# Altium PCB wireTest.PcbDoc (part 1 of 2)
Units mm, origin at the board's own origin, x right, y up, seen from the top; angles counter-clockwise.
Board outline 69.72 x 89.74 mm, 2 copper layers (Top Layer, Bottom Layer); 104 components, 99 nets, 356 pads, 85 vias.
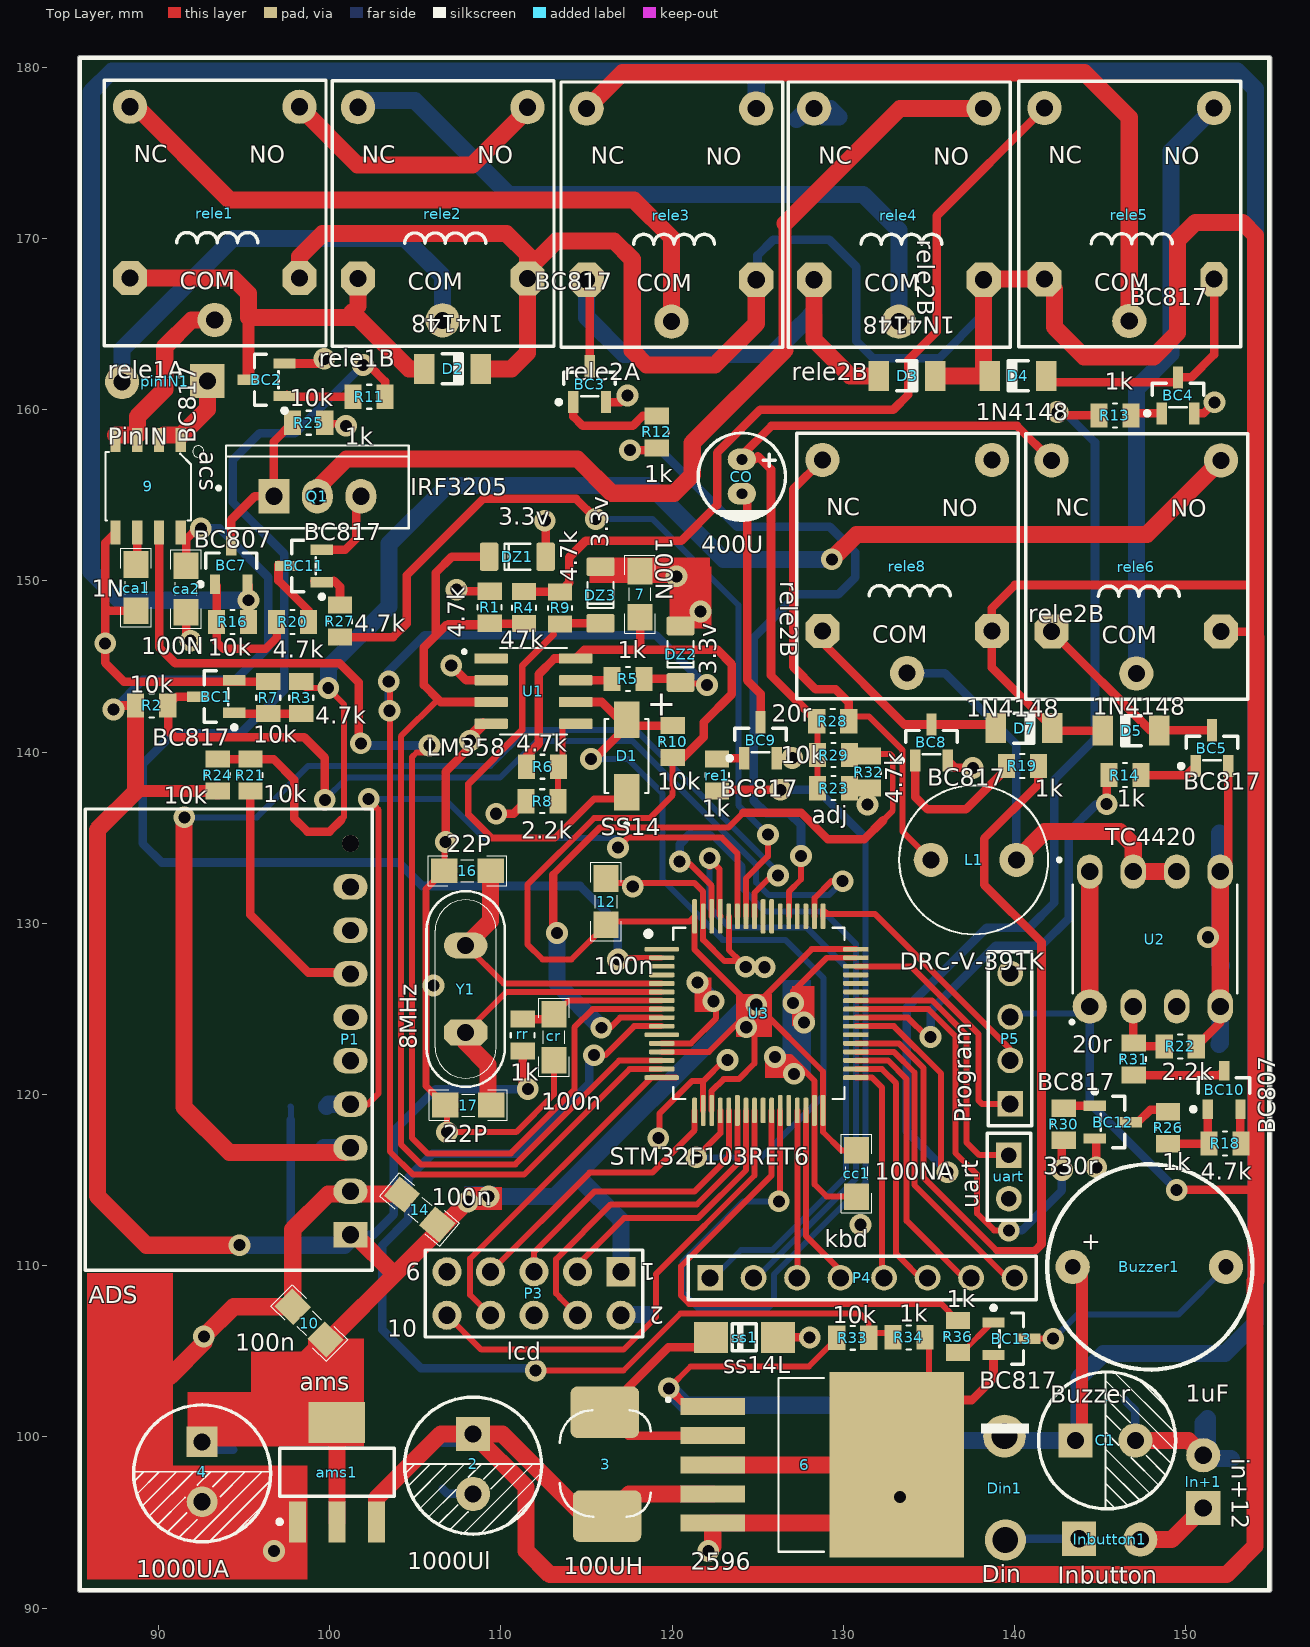
[diagram p0: Top Layer view]
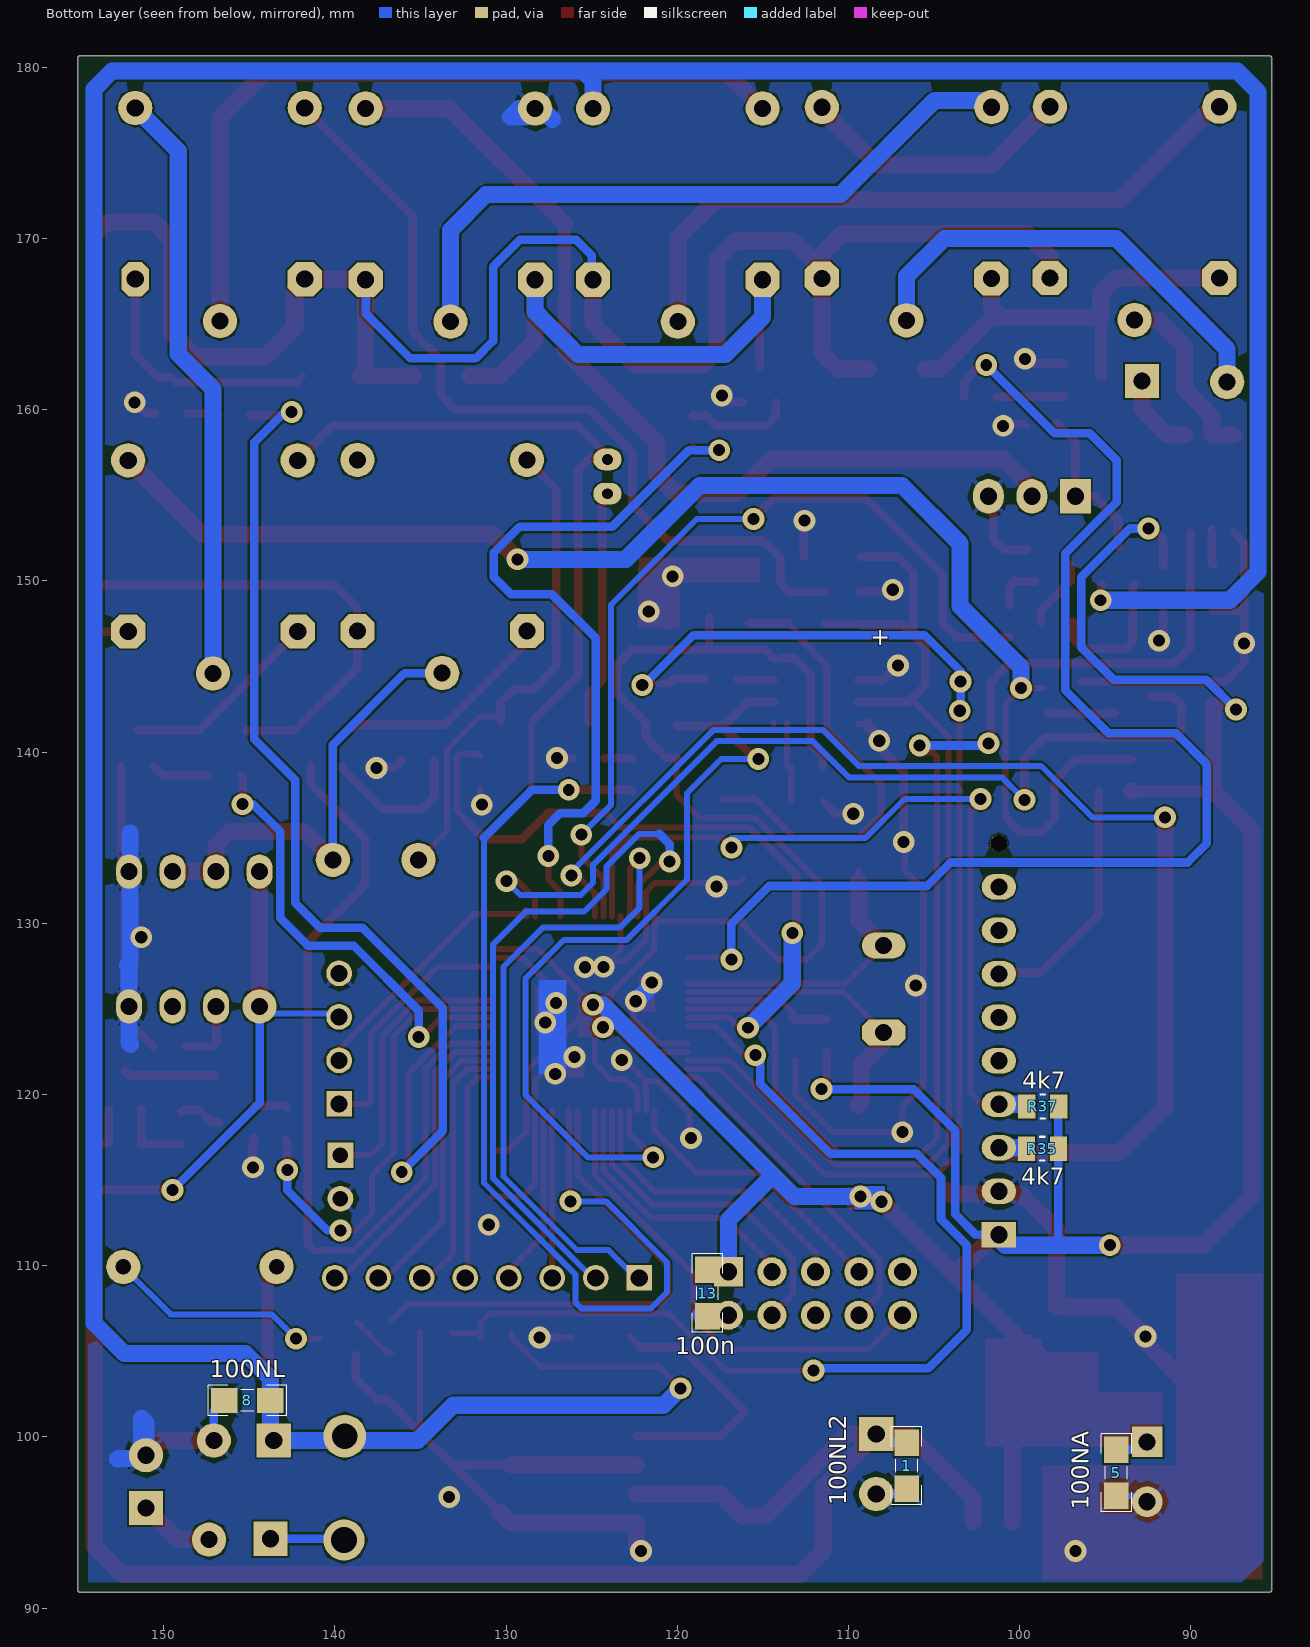
[diagram p1: Bottom Layer view, seen from below]
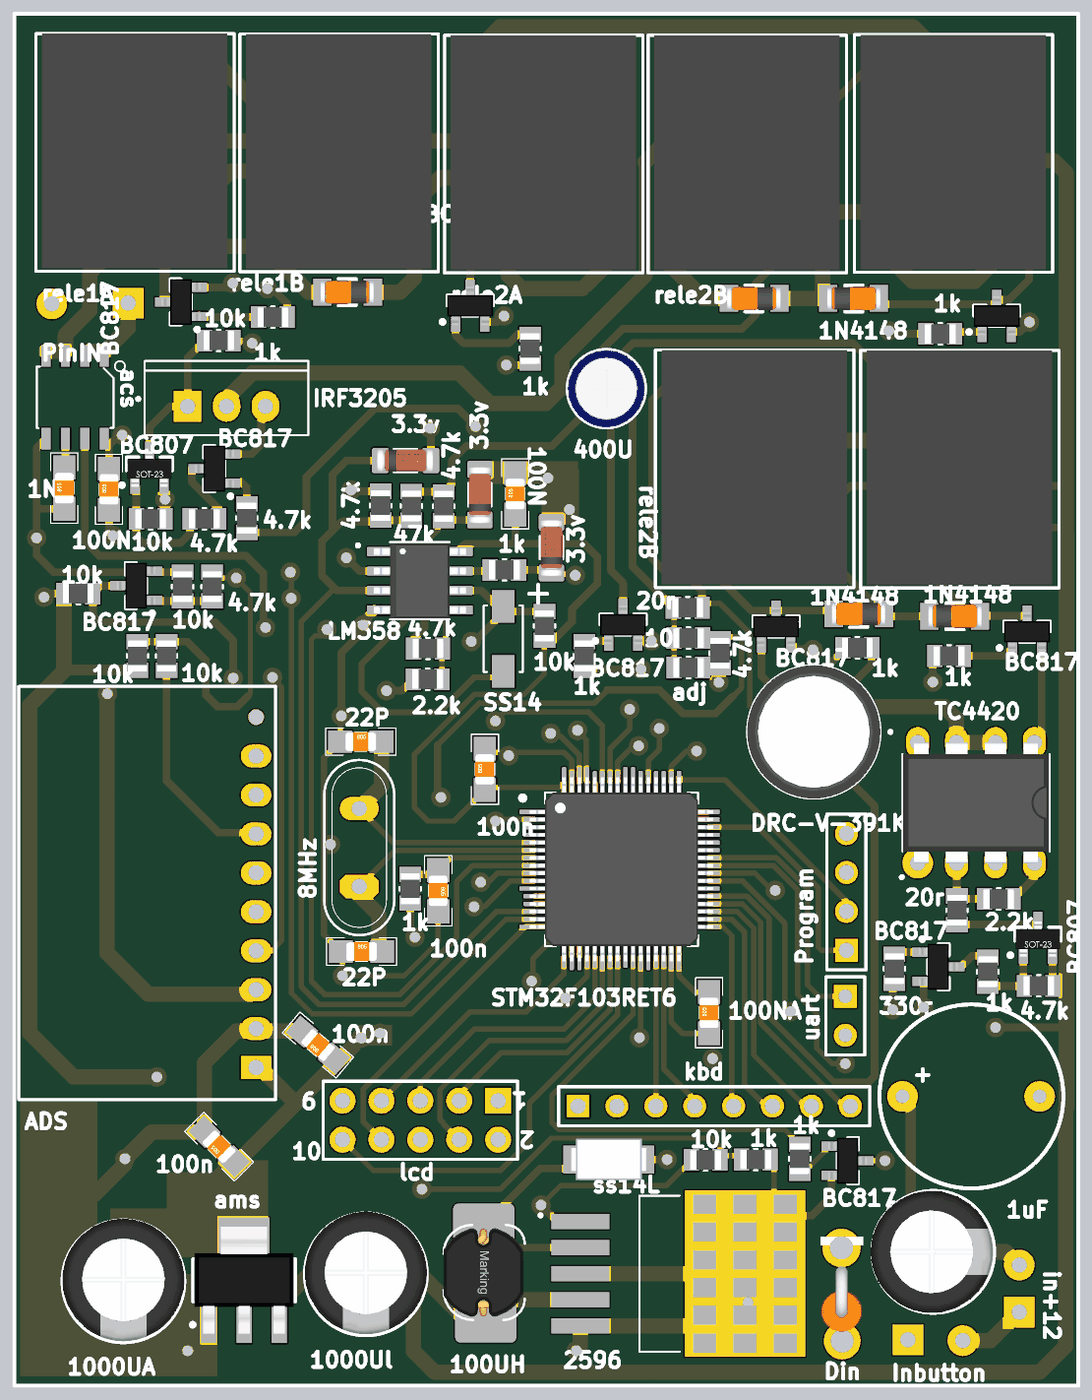
[diagram p2: 3D render of the assembled board from above, using the file's embedded part models]
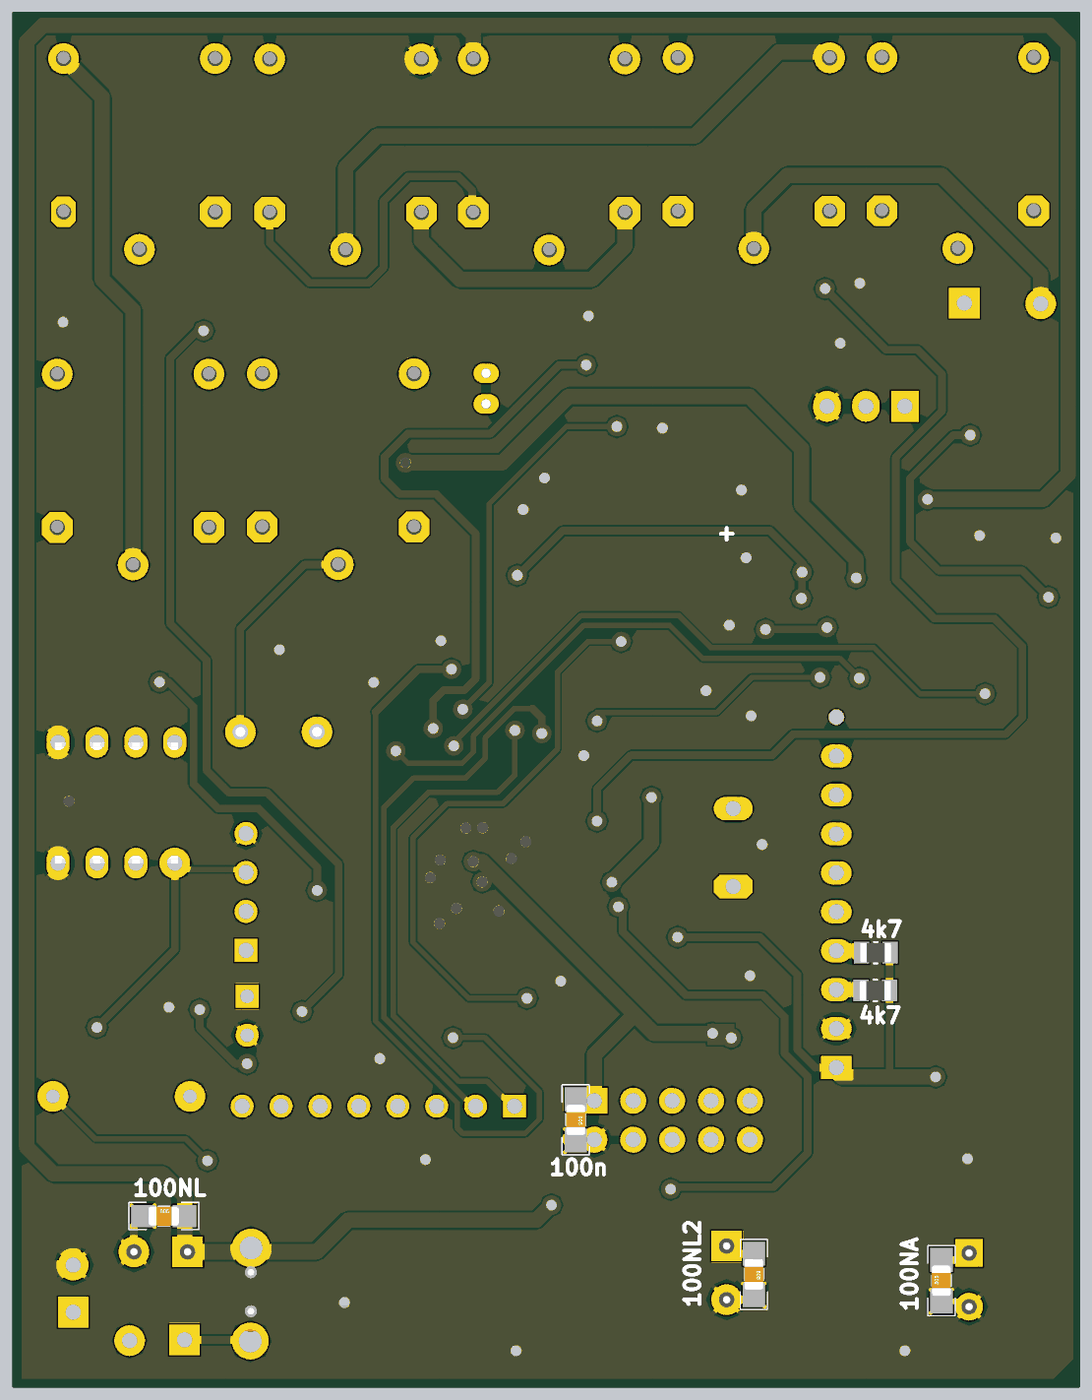
[diagram p3: 3D render of the assembled board from below, using the file's embedded part models]

## Layer stack, top to bottom
Top Solder: solder mask 0.0102, Solder Resist, Dk 3.5
Top Layer: signal copper 0.0356
Dielectric 1: dielectric 0.32, FR-4, Dk 4.8
Bottom Layer: signal copper 0.0356
Bottom Solder: solder mask 0.0102, Solder Resist, Dk 3.5

## Board outline
85.42,90.932 cw(c85.42,91.059) 85.293,91.059 85.293,180.543 cw(c85.42,180.543) 85.42,180.671 154.889,180.671 cw(c154.889,180.543) 155.017,180.543 155.017,91.059 cw(c154.889,91.059) 154.889,90.932

## Design rules (kind name [scope] priority, off if disabled: settings)
Clearance [All] p1: gap=0.1 ignorepadtopadclearanceinfootprint=FALSE
PolygonConnect [All] p1: thpad.connectstyle=Relief thpad.reliefconductorwidth=0.254 thpad.reliefentries=4 thpad.polygonreliefangle="45 Angle" thpad.airgapwidth=0.254 smdpad.connectstyle=Relief smdpad.reliefconductorwidth=0.254 smdpad.reliefentries=4 smdpad.polygonreliefangle="45 Angle" smdpad.airgapwidth=0.254 via.connectstyle=Direct via.reliefconductorwidth=0.254 via.reliefentries=4 via.polygonreliefangle="90 Angle" via.airgapwidth=0.254
RoutingVias [All] p1: holewidth=0.7 width=1.27 viastyle="Through Hole" minholewidth=0.7 minwidth=1.27 maxholewidth=0.7 maxwidth=1.27 viatemplateguid#1={EFB9FA06-F7A7-452A-BE94-403044DDEC13} viatemplatename#1=v127h71
SolderMaskExpansion [All] p1: expansion=0.102
Width [All] p1: maxlimit=1 minlimit=0.35 preferedwidth=0.5
30 further rules are at their usual default settings.

## Components (designator, comment, footprint, x,y, rotation, side; value= is the part's Value field where it differs from the comment)
1 "100NL2" CAPC3413X12N 106.604,98.323 r270 bottom
2 "1000Ul" "Cap electrolitic radial 8x12-3.5"#1 108.382,98.425 r270 top value=1uF
3 "100UH" "Inductor SMD 3x3.2mm" 116.053,98.45 r270 top value=4µ7
4 "1000UA" "Cap electrolitic radial 8x12-3.5"#2 92.558,97.968 r270 top value=1uF
5 "100NA" CAPC3413X12N 94.361,97.917 r90 bottom
6 "2596" TO170P1524X483-6N 128.778,98.374 r0 top
7 "100N" CAPC3413X12N 118.135,149.225 r90 top
8 "100NL" CAPC3413X12N 145.11,102.133 r180 bottom
9 "acs" SOIC8-1.27-5X4MM 89.408,155.524 r180 top
10 "100n" CAPC3413X12N 98.806,106.655 r135 top
12 "100n" CAPC3413X12N 116.154,131.267 r90 top
13 "100n" CAPC3413X12N 118.237,108.407 r270 bottom
14 "100n" CAPC3413X12N 105.258,113.284 r140 top
16 "22P" CAPC3413X12N 108.052,133.071 r0 top
17 "22P" CAPC3413X12N 108.102,119.38 r0 top
ams1 "ams" MP04A_N 100.432,97.942 r90 top
BC1 "BC817" SOT23_N 93.387,143.241 r180 top
BC2 "BC817" SOT23_N 96.317,161.747 r180 top
BC3 "BC817" SOT23_N 115.189,161.493 r90 top
BC4 "BC817" SOT23_N 149.555,160.833 r90 top
BC5 "BC817" SOT23_N 151.536,140.233 r90 top
BC7 "BC807" SOT23_BEC_N 94.259,150.927 r90 top
BC8 "BC817" SOT23_N 135.153,140.564 r90 top
BC9 "BC817" SOT23_N 125.171,140.691 r90 top
BC10 "BC807" SOT23_BEC_N 152.248,120.269 r90 top
BC11 "BC817" SOT23_N 98.501,150.876 r180 top
BC12 "BC817" SOT23_N 145.745,118.389 r0 top
BC13 "BC817" SOT23_N 139.827,105.74 r0 top
Buzzer1 "Buzzer" BUZZER 147.904,109.931 r0 top
C1 "1uF" "Cap electrolitic radial 8x12-3.5"#1 145.316,99.797 r0 top
ca1 "1N" CAPC3413X12N 88.697,149.606 r90 top
ca2 "100N" CAPC3413X12N 91.618,149.53 r90 top
cc1 "100NA" CAPC3413X12N 130.785,115.392 r90 top
CO "400U" "cap 01" 124.079,156.092 r90 top value=1uF
cr "100n" CAPC3413X12N 113.106,123.342 r270 top
D1 "SS14" DIOM4325X250N 117.348,139.776 r90 top
D2 "1N4148" "Diode 1n4148 SMD" 105.539,162.382 r0 top
D3 "1N4148" "Diode 1n4148 SMD" 132.08,161.976 r0 top
D4 "1N4148" "Diode 1n4148 SMD" 141.857,161.976 r180 top
D5 "1N4148" "Diode 1n4148 SMD" 148.461,141.249 r180 top
D7 "1N4148" "Diode 1n4148 SMD" 138.915,141.402 r0 top
Din1 "Din" "Diode 1W Stand" 139.446,97.206 r90 top
DZ1 "3.3v" "SOD80, LL-34" 110.973,151.409 r0 top value=12V
DZ2 "3.3v" "SOD80, LL-34" 120.498,145.72 r90 top value=12V
DZ3 "3.3v" "SOD80, LL-34" 115.824,149.174 r90 top value=12V
In+1 "in+12" HDR1X2#1 151.028,96.088 r90 top
Inbutton1 "Inbutton" HDR1X2#2 144.145,94.056 r0 top
L1 "DRC-V-391K" IND_DRC-V-391K 137.617,133.706 r180 top
P1 "ADS" HDR1X10 101.219,111.811 r90 top
P3 "lcd" HDR2X5 117.018,109.652 r180 top
P4 "kbd" HDR1X8 122.225,109.296 r0 top
P5 "Program" HDR1X4 139.751,119.456 r90 top
pinIN1 "PinIN" HDR1X2#3 91.745,161.62 r180 top
Q1 "IRF3205" TO254P1067X483X3124-3P 96.749,154.94 r0 top
R1 "4.7k" RESC2012X65N 109.347,148.463 r270 top
R2 "10k" RESC2012X65N 89.611,142.723 r180 top
R3 "4.7k" RESC2012X65N 98.349,143.18 r90 top
R4 "47k" RESC2012X65N 111.354,148.438 r90 top
R5 "1k" RESC2012X65N 117.424,144.272 r180 top
R6 "4.7k" RESC2012X65N 112.44,139.141 r180 top
R7 "10k" RESC2012X65N 96.418,143.18 r90 top
R8 "2.2k" RESC2012X65N 112.414,137.135 r180 top
R9 "4.7k" RESC2012X65N 113.462,148.418 r90 top
R10 "10k" RESC2012X65N 120.04,140.614 r270 top
R11 "1k" RESC2012X65N 102.311,160.757 r0 top
R12 "1k" RESC2012X65N 119.101,158.699 r270 top
R13 "1k" RESC2012X65N 145.872,159.664 r180 top
R14 "1k" RESC2012X65N 146.452,138.659 r180 top
R16 "10k" RESC2012X65N 94.336,147.599 r0 top
R18 "4.7k" RESC2012X65N 152.298,117.145 r180 top
R19 "1k" RESC2012X65N 140.462,139.192 r180 top
R20 "4.7k" RESC2012X65N 97.841,147.599 r180 top
R21 "10k" RESC2012X65N 95.377,138.654 r270 top
R22 "2.2k" RESC2012X65N 149.682,122.809 r180 top
R23 "adj" RESC2012X65N 129.438,137.897 r0 top
R24 "10k" RESC2012X65N 93.472,138.659 r270 top
R25 "10k" RESC2012X65N 98.781,159.233 r180 top
R26 "1k" RESC2012X65N 148.971,118.059 r90 top
R27 "4.7k" RESC2012X65N 100.609,147.65 r90 top
R28 "20r" RESC2012X65N 129.388,141.808 r180 top
R29 "10k" RESC2012X65N 129.438,139.827 r180 top
R30 "330r" RESC2012X65N 142.875,118.262 r270 top
R31 "20r" RESC2012X65N 146.964,122.072 r90 top
R32 "4.7k" RESC2012X65N 131.496,138.836 r270 top
R33 "10k" RESC2012X65N 130.556,105.791 r180 top
R34 "1k" RESC2012X65N 133.833,105.816 r180 top
R35 "4k7" RESC2012X65N 98.679,116.84 r0 bottom
R36 "1k" RESC2012X65N 136.703,105.867 r270 top
R37 "4k7" RESC2012X65N 98.654,119.304 r0 bottom
re1 "1k" RESC2012X65N 122.631,138.659 r270 top
rele1 "rele1A" "Relay 15.40x12.10x13.10"#1 93.291,165.241 r0 top
rele2 "rele1B" "Relay 15.40x12.10x13.10"#1 106.607,165.215 r0 top
rele3 "rele2A" "Relay 15.40x12.10x13.10"#1 119.967,165.139 r0 top
rele4 "rele2B" "Relay 15.40x12.10x13.10"#1 133.251,165.139 r0 top
rele5 "rele2B" "Relay 15.40x12.10x13.10"#2 146.707,165.172 r0 top
rele6 "rele2B" "Relay 15.40x12.10x13.10"#1 147.12,144.591 r0 top
rele8 "rele2B" "Relay 15.40x12.10x13.10"#1 133.734,144.616 r0 top
rr "1k" RESC2012X65N 111.277,123.469 r90 top
ss1 "ss14L" "Diode 1N4007 SMD" 126.196,105.816 r180 top
U1 "LM358" SOIC127P599X175-8N 111.906,143.561 r0 top
U2 "TC4420" DIP787W46P254L927H533Q8 148.209,129.083 r90 top
U3 "STM32F103RET6" QFP50P1200X1200X160-64N 125.07,124.739 r0 top
uart "uart" HDR1X2#4 139.675,116.459 r270 top
Y1 "8MHz" My_Crystal 107.95,126.162 r90 top

## Footprints (in the part's own frame and the unit in brackets; to place one, negate y for a bottom-side part, rotate by r counter-clockwise, add the part's x,y. Pads: shape width x height; smd on the part's side, far side on the other; paste and mask are expansions set on the pad)
BUZZER [mm] "BUZZER"
  round 2 hole 0.9: 1(-4.5,0) 2(4.45,0)
  silkscreen extent -6,-6 6,6
"cap 01" [mm]
  oval 1.27x1.651 hole 0.635: 1(1,0) 2(-1,0)
  silkscreen extent -2.55,-2.55 2.55,2.55, body extent -2.53,-2.53 2.53,2.53, height 12.54
"Cap electrolitic radial 8x12-3.5"#1 [mm] "Cap electrolitic radial 8x12-3.5-Design:Abbas Basereh"
  rect 2x2 hole 1: 1(-1.75,0)
  round 2 hole 1: 2(1.75,0)
  silkscreen extent -3.9,-4 4.1,4, body extent -4,-4 4,4, height 12.3
"Cap electrolitic radial 8x12-3.5"#2 [mm] "Cap electrolitic radial 8x12-3.5-Design:Abbas Basereh"
  rect 1.8x1.8 hole 1: 1(-1.75,0)
  round 1.8 hole 1: 2(1.75,0)
  silkscreen extent -3.9,-4 4.1,4, body extent -4,-4 4,4, height 12.3
CAPC3413X12N [mm] "Chip Capacitor, 2-Leads, Body 3/40x1/30mm, IPC Medium Density-Design:Abbas Basereh"
  rect 1.55x1.45 smd: 1(-1.35,0) 2(1.35,0)
  silkscreen extent -2.29,-0.89 2.29,0.89, body extent -1,-0.63 1,0.62, height 0.78
"Diode 1N4007 SMD" [mm] "DO-214AC 1N4001-4007"
  rect 2x1.8 smd: 1(0,0) 2(3.92,0)
  silkscreen extent 1.27,-0.81 2.67,0.83, body extent -0.54,-1.36 4.46,1.34, height 2.16
"Diode 1n4148 SMD" [mm] "Mini MELF SOD-80"
  rect 1.2x1.75 smd: 1(0,0) 2(3.3,0)
  silkscreen extent 1.04,-0.87 2.22,0.88, body extent -0.13,-0.75 3.37,0.75, height 1.55
"Diode 1W Stand" [mm]
  round 2.4 hole 1.5: 1(-3.226,-0.025)
  round 2.5 hole 1.5: 2(2.845,0.025)
  silkscreen extent 3,-1.4 3.58,1.4, body extent -2.62,-1.32 1.65,1.35, height 7.39
DIOM4325X250N [mm]
  rect 2.12x1.5 smd: A(2.115,0) C(-2.115,0)
  silkscreen extent -4.1,-1.28 2.16,1.28
DIP787W46P254L927H533Q8 [mm]
  round 2 hole 1: 1(-3.935,3.81)
  oval 2x1.5 hole 1: 2(-3.935,1.27) 3(-3.935,-1.27) 4(-3.935,-3.81) 5(3.935,-3.81) 6(3.935,-1.27) 7(3.935,1.27) 8(3.935,3.81)
  silkscreen extent -4.95,-4.8 3.18,4.95, body extent -3.96,-4.75 3.96,4.75, height 5.08
HDR1X2#1 [mm] "Connector; Header; 2 Position"
  rect 2x2 hole 1: 1(-0.229,0)
  round 2 hole 1: 2(2.845,0)
HDR1X2#2 [mm] "Connector; Header; 2 Position"
  rect 2x2 hole 1: 1(-0.381,0)
  round 2 hole 1: 2(3.2,-0.051)
HDR1X2#3 [mm] "Connector; Header; 2 Position"
  rect 2x2 hole 1: 1(-1.118,-0.051)
  round 2 hole 1: 2(3.861,0)
HDR1X2#4 [mm] "Connector; Header; 2 Position"
  rect 1.5x1.5 hole 0.9: 1(0,0)
  round 1.5 hole 0.9: 2(2.54,0)
  silkscreen extent -1.27,-1.27 3.81,1.27
HDR1X4 [mm] "Connector; Header; 4 Position"
  rect 1.5x1.5 hole 1: 1(0,0)
  round 1.5 hole 1: 2(2.54,0) 3(5.08,0) 4(7.62,0)
  silkscreen extent -1.27,-1.27 8.89,1.27
HDR1X8 [mm] "Connector; Header; 8 Position"
  rect 1.5x1.5 hole 1: 1(0,0)
  round 1.5 hole 1: 2(2.54,0) 3(5.08,0) 4(7.62,0) 5(10.16,0) 6(12.7,0) 7(15.24,0) 8(17.78,0)
  silkscreen extent -1.27,-1.27 19.05,1.27
HDR1X10 [mm] "Connector; Header; 10 Position"
  rect 1.5x2 hole 1: 1(0,0)
  oval 1.5x2 hole 1: 2(2.54,0) 3(5.08,0) 4(7.62,0) 5(10.16,0) 6(12.7,0) 7(15.24,0) 8(17.78,0) 9(20.32,0)
  round 1 hole 1: 10(22.86,0)
  silkscreen extent -2.08,-1.27 24.87,15.49
HDR2X5 [mm] "Connector; Header; 5x2 Position"
  rect 1.7x1.7 hole 1: 1(0,0)
  round 1.7 hole 1: 2(0,2.54) 3(2.54,0) 4(2.54,2.54) 5(5.08,0) 6(5.08,2.54) 7(7.62,0) 8(7.62,2.54) 9(10.16,0) 10(10.16,2.54)
  silkscreen extent -1.27,-1.27 11.43,3.81
IND_DRC-V-391K [mm]
  round 2 hole 1: 1(-2.5,0) 2(2.5,0)
  silkscreen extent -5.1,-4.35 4.35,4.35, body extent -4.35,-4.35 4.35,4.35, height 12.5
"Inductor SMD 3x3.2mm" [mil] "Inductor 4.7µH SMD 3x3.2mm"
  round 20 on Mech15: 0(0,0)
  rrect25% 118.11x157.48 smd: 1(-118,1) 2(121,6)
  silkscreen extent -122,-102 122,106, body extent -114,-102 114,102, height 177
MP04A_N [mm] "SOT223, 4-Leads, Body 6.5x3.5mm, Pitch 2.3mm, Lead Span 7mm, IPC Medium Density"
  rect 2.4x1 smd: 1(-2.9,2.3) 2(-2.9,0) 3(-2.9,-2.3)
  rect 2.4x3.3 smd: 4(2.9,0)
  silkscreen extent -3.02,-3.35 1.4,3.47, body extent -3.49,-3.24 3.49,3.24, height 1.64
My_Crystal [mm]
  oct 1.524x2.54 hole 1: 1(-2.54,0)
  oval 1.524x2.54 hole 1: 2(2.54,0)
  silkscreen extent -5.71,-2.29 5.71,2.29
QFP50P1200X1200X160-64N [mm]
  rrect50% 2x0.28 smd: 1(-5.67,3.75) 11(-5.67,-1.25) 16(-5.67,-3.75)
  rrect50% 1.49x0.28 smd: 2(-5.67,3.25) 3(-5.67,2.75) 4(-5.67,2.25) 5(-5.67,1.75) 6(-5.67,1.25) 7(-5.67,0.75) 8(-5.67,0.25) 9(-5.67,-0.25) 10(-5.67,-0.75) 12(-5.67,-1.75) 13(-5.67,-2.25) 14(-5.67,-2.75) 15(-5.67,-3.25) 33(5.67,-3.75) 34(5.67,-3.25) 35(5.67,-2.75) 36(5.67,-2.25) 37(5.67,-1.75) 38(5.67,-1.25) 39(5.67,-0.75) 40(5.67,-0.25) 41(5.67,0.25) 42(5.67,0.75) 43(5.67,1.25) 44(5.67,1.75) 45(5.67,2.25) 46(5.67,2.75) 47(5.67,3.25) 48(5.67,3.75)
  rrect50% 0.28x1.49 smd: 17(-3.75,-5.67) 20(-2.25,-5.67) 21(-1.75,-5.67) 23(-0.75,-5.67) 24(-0.25,-5.67) 25(0.25,-5.67) 26(0.75,-5.67) 29(2.25,-5.67) 30(2.75,-5.67) 49(3.75,5.67) 50(3.25,5.67) 51(2.75,5.67) 52(2.25,5.67) 53(1.75,5.67) 54(1.25,5.67) 57(-0.25,5.67) 58(-0.75,5.67) 59(-1.25,5.67) 60(-1.75,5.67) 63(-3.25,5.67)
  rrect50% 0.28x1.8 smd: 18(-3.25,-5.67) 19(-2.75,-5.67) 22(-1.25,-5.67) 27(1.25,-5.67) 28(1.75,-5.67) 31(3.25,-5.67) 32(3.75,-5.67)
  rrect50% 0.28x2 smd: 55(0.75,5.67) 56(0.25,5.67) 61(-2.25,5.67) 62(-2.75,5.67) 64(-3.75,5.67)
  silkscreen extent -6.6,-5 5,5, body extent -6,-6 6,6, height 1.6
"Relay 15.40x12.10x13.10"#1 [mm]
  round 2 hole 1: 1(0,0) 2(-4.95,12.45) 3(4.95,12.45)
  oct 2x2 hole 1: 4(-4.95,2.45) 5(4.95,2.45)
  silkscreen extent -6.45,-1.5 6.5,14, body extent -6.05,-1.3 6.05,14, height 16.1
"Relay 15.40x12.10x13.10"#2 [mm]
  round 2 hole 1: 1(0,0) 2(-4.95,12.45) 3(4.95,12.45)
  oct 2x2 hole 1: 4(-4.95,2.45)
  oct 1.6x2 hole 1: 5(4.95,2.45)
  silkscreen extent -6.45,-1.5 6.5,14, body extent -6.05,-1.3 6.05,14, height 16.1
RESC2012X65N [mm]
  rect 1x1.42 smd: 1(-0.935,0) 2(0.935,0)
  silkscreen extent -0.12,-0.7 0.12,0.7, body extent -1,-0.63 1,0.63, height 0.65
"SOD80, LL-34" [mm] "Diode, MiniMELF"
  round 0.5 on Mech15: 0(0,0)
  rrect25% 1.1x1.65 smd: 1(1.65,0) 2(-1.65,0)
  silkscreen extent -0.76,-0.76 0.76,0.76, body extent -1.88,-0.8 1.82,0.8, height 1.6
SOIC8-1.27-5X4MM [mm]
  rect 0.6x1.4 smd: 1(-1.905,-2.7) 2(-0.635,-2.7) 3(0.635,-2.7) 4(1.905,-2.7) 5(1.905,2.7) 6(0.635,2.7) 7(-0.635,2.7) 8(-1.905,2.7)
  silkscreen extent -3.25,-2.36 2.5,2
SOIC127P599X175-8N [mm]
  rrect25% 1.97x0.6 smd: 1(-2.47,1.905) 2(-2.47,0.635) 3(-2.47,-0.635) 4(-2.47,-1.905) 5(2.47,-1.905) 6(2.47,-0.635) 7(2.47,0.635) 8(2.47,1.905)
  silkscreen extent -4.14,-2.52 1.95,2.52, body extent -3,-2.45 3,2.45, height 1.75
SOT23_BEC_N [mm] "SOT23, 3-Leads, Body 2.9x1.3mm, Pitch 0.95mm, Lead Span 2.4mm, IPC Medium Density"
  rect 1.15x0.6 smd: 1(-1.125,0.95) 2(-1.125,-0.95) 3(1.125,0)
  silkscreen extent -1.25,-1.5 0.7,1.92, body extent -1.23,-1.45 1.07,1.45, height 1
SOT23_N [mm] "SOT23, 3-Leads, Body 2.9x1.3mm, Pitch 0.95mm, Lead Span 2.3mm, IPC Medium Density"
  rect 1.3x0.6 smd: 1(-1.05,0.95) 2(-1.05,-0.95) 3(1.05,0)
  silkscreen extent -1.18,-1.5 0.7,1.92, body extent -1.27,-1.5 1.27,1.5, height 1.1
TO170P1524X483-6N [mm]
  rect 3.79x0.99 smd: 1(-6.4,3.4) 2(-6.4,1.7) 3(-6.4,0) 4(-6.4,-1.7) 5(-6.4,-3.4)
  rect 7.88x10.84 smd paste-6: 6(4.35,0)
  silkscreen extent -9.1,-5.08 0.09,5.08
TO254P1067X483X3124-3P [mm]
  rect 1.8x2.01 hole 1: 1(0,0)
  oval 1.8x2.01 hole 1: 2(2.54,0) 3(5.08,0)
  silkscreen extent -3.33,-1.87 7.88,2.96

## Part data
1 5 7 8 10 12 13 14 16 17 ca1 ca2 cc1 cr: library part "CAP SMD 0805", "CAP 0805", Data=16-12-2016, Desc.="CAP SMD 0805", Designer="Abbas Basereh"
2 4 C1: library part "Cap ELECTROLITIC TOTAL SIZE", "Cap electrolitic radial", Data=16-12-2016, Designer="Abbas Basereh"
3: library part "Inductor 4.7µH SMD 3x3.2mm", "Inductor 4.7µH SMD 3x3.2mm", Operating Temperature="-40°C ~ 125°C", Tolerance=±20%, Package / Case="Inductor 4.7µH SMD 3x3.2mm", SCDType=source, Supplier 1=Digi-Key, Type="Ferrite Core"
6: library part LM2596S-5.0, Package=None, Availability=Unavailable, MP=LM2596S-5.0, Price=None
9: library part CURRENT-ACS712ELCTR-05B-T(SOIC8-5X4MM), "Current Sensor 5A 1 Channel Hall Effect, Open Loop Bidirectional 8-SOIC _0.154, 3.90mm Width_", Package="SOIC-8 Allegro MicroSystems LLC", Availability=Unavailable, MF=Allegro, MP=ACS712ELCTR-05B-T, Price=None, SnapEDA_Link=https://www.snapeda.com/parts/ACS712ELCTR-05B-T/Allegro%20Industries/view-part/217679/?ref=snap
ams1: library part LM1117IMP-x.x, "x.x Volt, 800mA Low-Dropout Linear Regulator, 4-pin SOT-223", Manufacturer="National Semiconductor", PackageTopMarking=XYTT*N05B, PartNumber=LM1117IMP-3.3, PowerWise=N, Supplier Part Number 1=7614123, Code_IPC=SOT223-4, Code_JEDEC=TO-261-AA, ComponentLink1Description="LM1117 Datasheet", ComponentLink1URL=http://www.national.com/ds/LM/LM1117.pdf, ComponentLink2Description="LM1117 Web Page", ComponentLink2URL=http://www.national.com/pf/LM/LM1117.html, ComponentLink3Description="MP04A Package Page", ComponentLink3URL=http://www.national.com/packaging/folders/mp04a.html, CompType="LDO IC", DatasheetVersion=Apr-2006, PackageDescription="Molded SOT-223, 6.50 x 3.56 x 1.6mm Body, 4 Lead, 2.3mm Pitch", PackageReference=MP04A, PackageVersion="revB, Apr-2003", PinCount=4, Published=4-Dec-2008, Publisher="Altium Limited", RoHS=N, Supplier 1=Farnell
BC1 BC2 BC3 BC4 BC5 BC8 BC9 BC11 BC12 BC13: "45 V, 500 mA NPN general-purpose transistors", ComponentLink1Description="Manufacturer Link", ComponentLink1URL=http://www.nxp.com/, ComponentLink2Description=Datasheet, ComponentLink2URL=http://www.nxp.com/, DatasheetVersion=2017, LatestRevisionDate=2017, LatestRevisionNote="IPC-7351 Footprint Added.", PackageDescription="3-Pin SOT-23 Package 0.95 mm Pitch, 2.3 mm Lead Span", PackageReference=SOT23, PackageVersion=2017-2-8, Published=2017-2-8, Publisher="Abbas Basereh"
BC7 BC10: "PNP General-purpose Transistor", LatestRevisionDate=29-May-2009, LatestRevisionNote="IPC-7351 Footprint Added.", PackageDescription="3-Pin SOT-23 Package 0.95 mm Pitch, 2.4 mm Lead Span", PackageReference=SOT-23B, PackageVersion=Aug-1999, Published=8-Jun-2000, Publisher="Altium Limited"
CO: library part Cap-Polar, "Polar Capacitor", Voltage=16V, Adding Date=1387/12/20, Designer="Saeid Jorablo", Organazation=ControTec
D1: Package=None, Availability=Unavailable, MP=SS14, Price=None
D2 D3 D4 D5 D7: library part "1N4148 SMD", "General Semicoductor"
Din1 ss1: library part "Diode DIP Package", "Diode DIP Package", Code_JEDEC=DO-204-AH, ComponentLink1Description="Manufacturer Link", ComponentLink1URL=http://www.fairchildsemi.com/, ComponentLink2Description=Datasheet, ComponentLink2URL=http://www.fairchildsemi.com/ds/1N%2F1N4148.pdf, DatasheetVersion=1997, LatestRevisionDate=17-Jul-2002, LatestRevisionNote="Re-released for DXP Platform.", PackageDescription="Diode, Axial; Body 3.8 x 1.9 mm (LxDia. max), Lead Dia. 0.53 mm (max)", Published=8-Jun-2000, Publisher="Altium Limited"
DZ1 DZ2 DZ3: library part "ZENER GENERAL DIODE", "DIODE ZENER GENERAL", ComponentLink1Description="Manufacturer Link", ComponentLink2Description=Datasheet, PackageDescription="DIODE GEN ZENER", PackageReference="DO 35", PackageVersion=2017-1-12, Published=2017-1-12, Publisher="Abbas Basereh"
In+1 Inbutton1 pinIN1 uart: library part "Header 2", "Header, 2-Pin", LatestRevisionDate=17-Jul-2002, LatestRevisionNote="Re-released for DXP Platform.", Publisher="Altium Limited"
L1: "Radial Coil Inductor", Package=None, Availability="In Stock", Check_prices=https://www.snapeda.com/parts/DRC-V-391K/Bel+Fuse/view-part/?ref=eda, MF="Bel Fuse", MP=DRC-V-391K, Price=None, Purchase-URL=https://pricing.snapeda.com/search/part/DRC-V-391K/?ref=eda, SnapEDA_Link=https://www.snapeda.com/parts/DRC-V-391K/Bel+Fuse/view-part/?ref=snap
P1: library part "Header 10", "Header, 10-Pin", LatestRevisionDate=17-Jul-2002, LatestRevisionNote="Re-released for DXP Platform.", Publisher="Altium Limited"
P3: library part "Header 5X2", "Header, 5-Pin, Dual row", LatestRevisionDate=17-Jul-2002, LatestRevisionNote="Re-released for DXP Platform.", Publisher="Altium Limited"
P4: library part "Header 8", "Header, 8-Pin", LatestRevisionDate=17-Jul-2002, LatestRevisionNote="Re-released for DXP Platform.", Publisher="Altium Limited"
P5: library part "Header 4", "Header, 4-Pin", LatestRevisionDate=17-Jul-2002, LatestRevisionNote="Re-released for DXP Platform.", Publisher="Altium Limited"
Q1: library part IRF3205PBF, "N-Channel 55V 110A _Tc_ 200W _Tc_ Through Hole TO-220AB", Package="TO-220 International Rectifier", Availability=Unavailable, MF="Infineon Technologies", MP=IRF3205PBF, Price=None, SnapEDA_Link=https://www.snapeda.com/parts/IRF3205PBF/Infineon%20Technologies/view-part/98571/?ref=snap
R1 R2 R3 R4 R5 R6 R7 R8 R9 R10 R11 R12 R13 R14 R16 R18 R19 R20 R21 R22 R23 R24 R25 R26 R27 R28 R29 R30 R31 R32 R33 R34 R35 R36 R37 re1 rr: library part CRGCQ0805F10K, "10 kOhms ±1% 0.125W, 1/8W Chip Resistor 0805 (2012 Metric) Automotive AEC-Q200, Moisture Resistant Thick Film", Package="2012 TE Connectivity", Check_prices=https://www.snapeda.com/parts/CRGCQ0805F10K/TE+Connectivity/view-part/?ref=eda, MF="TE Connectivity", MP=CRGCQ0805F10K, SnapEDA_Link=https://www.snapeda.com/parts/CRGCQ0805F10K/TE+Connectivity/view-part/?ref=snap
rele1 rele2 rele3 rele4 rele5 rele6 rele8: library part "RELAY General", "Relay_SPDT POWER NEEDLE", Company=E.P.I.L, Design_Date=2011/10/31, Designer="Ali Hafizi"
U1: library part LM358DRG3, "Dual, 30-V, 700-kHz operational amplifier", Package="SOIC-8 Texas Instruments", Check_prices=https://www.snapeda.com/parts/LM358DRG3/Texas+Instruments/view-part/?ref=eda, MF="Texas Instruments", MP=LM358DRG3, SnapEDA_Link=https://www.snapeda.com/parts/LM358DRG3/Texas+Instruments/view-part/?ref=snap
U2: library part TC4420CPA, "Microchip MOSFET Power Driver 6A 4.5 to 18V Non-Inverting 8-Pin PDIP", Package="DIP-8 Microchip", Check_prices=https://www.snapeda.com/parts/TC4420CPA/Microchip/view-part/?ref=eda, MF=Microchip, MP=TC4420CPA, SnapEDA_Link=https://www.snapeda.com/parts/TC4420CPA/Microchip/view-part/?ref=snap
U3: "ARM® Cortex®-M3 STM32F1 Microcontroller IC 32-Bit 72MHz 512KB (512K x 8) FLASH 64-LQFP (10x10)", Package="LQFP-64 STMicroelectronics", Check_prices=https://www.snapeda.com/parts/STM32F103RET6/STMicroelectronics/view-part/?ref=eda, MF=STMicroelectronics, MP=STM32F103RET6, SnapEDA_Link=https://www.snapeda.com/parts/STM32F103RET6/STMicroelectronics/view-part/?ref=snap
Y1: library part CRYSTAL, "Crystal"
Buzzer1: ComponentLinkURL=www.picpars.com, Designer="Seyed Mohsen Ghasemain"

## Via types
v1: diameter 1.27, hole 0.7, Top Layer to Bottom Layer, tented both sides, 54 vias
v2: diameter 1.27, hole 0.711, Top Layer to Bottom Layer, tented both sides, 31 vias

## Nets (pads, with @x,y where several pads share a name; then routed paths per layer and width w, separated by ;. In a path a pad name is that pad's centre, name@x,y a point inside that pad or via, vN(x,y) a via of type N, cw(c..) or ccw(c..) an arc to the next point about the centre after c; other vN are vias at no path point)
+5v: 1.1 2.1 3.2 6.4 ams1.3 BC10.2 D2.2 D3.2 D4.2 D5.2 D7.2 P5.3 R18.1 rele1.5 rele2.5 rele3.5 rele4.5 rele5.4 rele6.5 rele8.5 U2.1 U2.8 | length 330.8
  Top Layer w0.35: 122.504,162.611 122.707,162.814 ; P5.3 P5.3@139.929,124.714 ; U2.1@143.965,124.714 U2.1
  Top Layer w0.5: D5.2 142.367,141.249 D7.2 138.684,144.932 rele8.5 138.684,148.412 140.03,149.758 154.051,149.758 154.051,147.218 153.873,147.041 rele6.5 ; v1(149.479,114.427) 154.051,114.427 154.051,117.221 153.975,117.145 R18.1 153.198,117.181 BC10.2
  Top Layer w1: rele1.5 98.241,168.929 99.593,170.282 110.338,170.282 111.557,169.062 rele2.5@111.557,168.173 ; ams1.3 102.732,96.407 106.5,100.175 2.1 ; D2.2 110.617,162.382 111.557,163.322 rele2.5 rele2.5@111.557,168.173 ; 6.4 117.502,96.674 3.2 114.884,95.377 110.086,100.175 2.1 ; 122.504,162.611 118.516,162.611 117.678,163.449 117.678,168.783 116.611,169.85 113.233,169.85 rele2.5@111.557,168.173 ; 122.707,162.814 124.917,165.024 rele3.5 ; D3.2 D4.2 138.201,162.331 rele4.5 138.234,167.622 rele5.4 142.342,167.038 142.342,164.821 144.069,163.093 148.133,163.093 149.53,164.49 149.53,169.901 150.571,170.942 153.314,170.942 154.079,170.177 154.079,146.764 154.051,146.736 154.104,146.683 154.104,109.153 154.051,109.1 154.051,93.632 152.379,91.96 112.866,91.96 111.481,93.345 111.481,97.076 2.1 ; U2.1 U2.8
  Bottom Layer w0.35: P5.3 139.954,124.739 143.991,124.739 U2.1
  Bottom Layer w0.5: 1.1 107.88,99.673 2.1 ; rele3.5 124.993,167.665 124.993,169.012 125.908,169.926 129.184,169.926 130.759,168.351 130.759,164.008 131.775,162.992 135.585,162.992 138.201,165.608 rele4.5 ; U2.1 144.399,119.507 v1(149.479,114.427)
+12in: 6.1 8.2 BC7.2 Buzzer1.1 C1.1 Din1.2 R16.2 R33.2 rele3.3 | length 247.4
  Top Layer w0.35: v1(119.812,102.845) 121.082,104.115 127.991,104.115 129.697,105.821 R33.2@129.697,106.096 ; Buzzer1.1 Buzzer1.1@143.942,109.394 ; C1.1 C1.1@143.942,100.172
  Top Layer w0.5: BC7.2 95.271,149.741 v1(95.271,148.869) v1@95.271,148.844 ; v1(119.812,102.845) 120.882,101.774 6.1
  Top Layer w0.7: C1.1@143.942,100.172 Buzzer1.1@143.942,109.394
  Bottom Layer w1: v1(95.271,148.869) 87.732,148.869 86.081,150.52 86.081,178.562 87.3,179.781 125.501,179.781 ; v1(119.812,102.845) 120.802,101.854 133.096,101.854 135.153,99.797 C1.1 143.76,99.991 8.2 143.76,103.425 145.212,104.877 152.293,104.877 154.074,106.657 154.074,178.717 153.01,179.781 125.501,179.781 ; rele3.3 124.917,179.019 ; 124.917,179.197 125.501,179.781
ads: R3.2 R21.1 R24.1 rele6.3 | length 87.4
  Top Layer w0.35: R24.1 93.477,139.589 R21.1 96.728,139.589 ; R3.2@98.582,143.739 v1(99.924,143.739) 99.924,143.713 100.846,142.791 100.846,136.202 100.686,136.042
  Top Layer w0.5: R24.1 96.728,139.594 97.942,138.379 97.942,136.119 98.704,135.357 100,135.357 100.686,136.042
  Top Layer w1: v1(129.337,151.257) 130.785,152.705 147.734,152.705 rele6.3
  Bottom Layer w1: v1@99.936,143.701 99.936,144.97 103.48,148.514 103.48,152.171 106.883,155.575 118.694,155.575 123.012,151.257 v1(129.337,151.257)
GND: 1.2 2.2 4.2 5.1 6.3 6.5 6.6 7.2 8.1 9.5 10.2 12.2 13.2 14.2 16.1 17.1 ams1.1 BC1.2 BC2.2 BC3.2 BC4.2 BC5.2 BC8.2 BC9.2 BC11.2 BC12.2 BC13.2 C1.2 ca1.1 ca2.1 cc1.1 cr.2 DZ1.1 DZ2.1 DZ3.1 In+1.2 P1.2 P3.2 P5.4 Q1.3 R1.1 R7.2 R8.2 R22.1 R23.2 R25.1 R32.2 R34.1 rele4.2 ss1.1 U1.2 U1.4 U2.4 U2.5 U3.12 U3.18 U3.31 U3.47 U3.60 U3.63 uart.2 | length 277.5
  Top Layer w0.35: v1(96.749,93.345) 98.132,94.728 ams1.1 ; R25.1@99.589,159.08 R25.1@100.152,159.08 ; R25.1 100.787,159.233 v1(100.965,159.055) v1@101.092,159.055 ; 16.1 106.702,134.946 v1@106.782,135.026 ; 17.1@106.829,119.228 106.858,119.198 v1(106.858,117.805) 110.896,117.805 113.106,120.015 cr.2 ; v2(108.204,140.665) 109.195,141.656 U1.4 ; v2@109.703,136.423 v2(109.728,136.398) ; R8.2@111.226,136.881 R8.2 ; v2@112.573,153.34 v2(112.573,153.518) ; DZ3.1 117.886,150.824 7.2 ; 12.2 116.412,132.359 121.31,132.359 121.82,131.85 U3.63 121.82,129.031 123.063,127.787 v2@123.977,127.787 ; v1(119.202,117.45) 119.253,117.399 119.278,117.399 119.278,118.897 121.159,120.778 121.82,120.778 ; U3.12 121.11,122.989 122.58,124.46 122.58,125.298 v2(122.428,125.451) ; U3.18 121.82,120.778 ; v2(123.241,122.022) 123.063,122.022 121.82,120.778 ; U3.60 123.32,128.445 v2@123.977,127.787 ; v2(124.308,127.457) v2@123.977,127.787 ; v2@125.654,122.072 125.781,122.199 v2(126.009,122.199) 126.924,122.199 128.32,120.804 U3.31 128.32,114.758 129.036,114.042 cc1.1 ; ss1.1 ss1.1@126.949,105.816 ; v2(127.076,125.349) 127.076,126.035 129.031,127.989 U3.47 ; v1(131.42,136.931) 131.42,136.957 131.496,137.033 R32.2 ; 6.6@135.022,100.268 R34.1@135.022,106.096 ; v1(151.689,160.426) 151.79,160.426 v1@151.774,160.443 ; U2.5 U2.5@152.486,133.485
  Top Layer w0.4: 16.1 105.639,132.008 105.639,120.494 17.1
  Top Layer w0.5: 9.5 86.893,152.215 86.893,148.438 ; ca1.1 87.075,148.256 86.893,148.438 ; 90.691,103.543 88.671,101.524 88.671,97.942 90.396,96.218 4.2 92.911,96.571 95.682,96.571 97.21,95.042 ams1.1 ; ca2.1 91.618,146.888 91.872,146.634 v1(91.872,146.507) ; v2@92.659,105.512 94.757,107.609 ; R7.2 87.99,144.115 86.893,145.212 v1(86.893,146.355) 86.893,148.438 ; 10.2@97.358,107.609 10.2 ; BC2.2 99.426,162.697 v1(99.695,162.966) ; BC11.2 100.924,151.826 101.549,152.451 101.549,154.661 Q1.3 ; v1(106.782,134.747) 106.782,135.026 106.782,138.862 108.204,140.284 v2(108.204,140.665) 108.204,140.995 U1.4@108.941,141.732 ; v2(107.112,145.059) 107.975,144.196 U1.2 ; v2(107.417,149.479) 107.498,149.398 R1.1 ; v2(109.728,136.398) 110.743,136.398 R8.2@111.226,136.881 ; v2(112.573,153.518) 112.623,153.468 DZ1.1 ; BC3.2 117.009,160.443 v1(117.399,160.833) ; 7.2 118.444,150.266 v1(120.269,150.266) 120.498,150.038 DZ2.1 ; BC9.2 126.13,139.649 v1(127.025,139.649) ; ss1.1@126.949,105.816 v1(128.041,105.816) ; 6.6@129.718,98.374 6.6 ; 6.6@130.343,95.59 6.6 ; BC8.2 136.527,139.09 137.693,139.09 137.668,139.065 v1(137.566,139.065) ; BC13.2 138.777,103.42 137.516,102.159 136.913,102.159 135.022,100.268 6.6 ; BC12.2 144.78,117.355 v1(144.78,115.748) ; BC4.2 151.045,159.783 v1(151.689,160.426) ; R22.1 152.019,124.211 U2.4 ; U2.5@152.486,133.485 BC5.2
  Top Layer w1: 90.691,103.543 v2@92.659,105.512 ; v2(92.659,105.867) 94.401,107.609 94.757,107.609 10.2@97.358,107.609 ; 10.2 97.851,112.126 99.924,114.198 104.071,114.198 14.2@104.223,114.351 ; v2(122.123,93.345) 122.378,93.6 6.5 129.728,94.974 6.6@130.343,95.59 ; 6.3 6.6@129.718,98.374 ; C1.2 150.165,99.797 In+1.2 ; U2.4 U2.5
  Bottom Layer w0.35: 4.2 92.907,96.567 5.1 ; 13.2@118.618,107.133 118.974,107.133
  Bottom Layer w0.5: 1.2 106.902,96.675 2.2 ; 8.1 147.066,101.528 C1.2
  Bottom Layer w1: P3.2 117.065,107.159 13.2@118.618,107.159 ; v2(121.488,126.543) 121.488,126.39 v2(122.428,125.451) ; 127.279,176.936 127.813,177.47 128.448,177.47 128.829,177.089 129.743,177.089 129.243,177.589 rele4.2 ; In+1.2 151.028,100.813 151.282,101.067 151.282,99.007 151.028,98.753 152.63,98.753 152.679,98.704 ; 151.943,122.936 152.019,123.012 U2.4 152.019,127.457 152.095,127.533 151.968,127.66 151.968,135.28
  other v2: 133.325,96.495 131.013,112.395 127.127,121.209 127.711,124.206 106.07,126.365 125.4,127.432 151.308,129.184 117.704,132.156 121.666,148.209
in1: R4.2 R9.2 rele5.2 | length 49.9
  Top Layer w0.5: R4.2 113.443,149.373 R9.2 113.995,149.887 113.995,151.384 114.96,152.349 120.548,152.349 122.631,154.432 122.631,157.48 125.146,159.995 132.918,159.995 133.807,160.884 133.807,162.916 135.458,164.567 135.458,171.323 rele5.2
Net3_1: 3.1 6.2 ss1.2 | length 15.5
  Top Layer w0.35: 3.1 3.1@116.078,101.524 ; ss1.2@122.14,105.232 ss1.2@122.801,105.893
  Top Layer w0.5: 3.1 117.451,100.074 6.2 ; 3.1@116.078,101.524 119.786,105.232 ss1.2@122.14,105.232
Net9_1: 9.1 9.2 pinIN1.1 | length 5.3
  Top Layer w0.35: pinIN1.1@92.687,161.146 pinIN1.1@92.786,161.671
  Top Layer w1: 90.348,158.529 91.371,158.529 92.862,160.02 pinIN1.1
Net9_3: 9.3 9.4 rele1.1 | length 10.6
  Top Layer w0.35: 88.468,158.529 9.3@88.773,158.529
  Top Layer w1: 9.4@87.503,158.529 88.468,158.529 ; 9.3@88.773,158.529 88.773,159.588 90.373,161.188 90.373,163.678 91.936,165.241 rele1.1
Net9_6: 9.6 ca1.2 | length 2
  Top Layer w0.35: 9.6@88.773,153.129 9.6@88.849,153.053
  Top Layer w0.5: ca1.2 88.773,151.032 9.6
Net16_2: 16.2 U3.5 Y1.2 | length 17.3
  Top Layer w0.35: Y1.2 110.162,126.489 U3.5 ; 16.2@109.402,132.436 16.2
  Top Layer w1: Y1.2 109.402,130.153 16.2@109.402,132.436
Net17_2: 17.2 U3.6 Y1.1 | length 17.4
  Top Layer w0.35: Y1.1 110.318,125.989 U3.6 ; 17.2@109.529,119.228 17.2@109.529,119.38
  Top Layer w1: Y1.1 107.95,123.038 109.245,121.742 109.245,119.587 17.2
NetBC1_1: BC1.1 R3.1 R7.1 | length 6.5
  Top Layer w0.35: BC1.1@94.894,142.291 R7.1@96.418,142.291
  Top Layer w0.5: BC1.1@94.894,142.291 BC1.1 94.483,142.245 R7.1 R3.1 98.303,142.291 R3.1@97.795,142.291
NetBC2_1: BC2.1 R11.1 | length 4.2
  Top Layer w0.35: BC2.1 BC2.1@97.504,160.934
  Top Layer w0.5: BC2.1 97.407,160.757 R11.1
NetBC2_3: BC2.3 D2.1 rele1.4 rele2.4 | length 26.4
  Top Layer w0.35: rele1.4@88.341,168.072 rele1.4@88.532,167.881
  Top Layer w0.5: 101.321,165.71 101.657,166.046
  Top Layer w0.7: BC2.3@95.267,162.001 95.267,165.379
  Top Layer w1: rele1.4 94.361,167.691 95.267,166.785 95.267,165.379 101.651,165.379 ; 101.321,165.71 101.651,165.379 ; 101.657,166.046 rele2.4 ; D2.1 104.648,162.382 101.651,165.379
NetBC3_1: BC3.1 R12.1 | length 6.3
  Top Layer w0.5: BC3.1 114.239,159.598 114.783,159.055 117.704,159.055 118.283,159.634 R12.1 R12.1@119.008,159.727
NetBC3_3: BC3.3 D3.1 rele3.4 rele4.4 | length 33.7
  Top Layer w0.35: rele4.4@128.295,167.589 128.295,167.964 rele4.4@128.301,167.97
  Top Layer w0.5: rele3.4@114.935,167.507 rele3.4 115.189,167.417 BC3.3
  Top Layer w1: rele4.4 128.301,164.065 130.39,161.976 D3.1
  Bottom Layer w0.35: rele3.4 rele3.4@115.017,167.97 ; 127.521,164.935 127.622,165.036 ; 127.711,164.948 127.711,165.125 ; rele4.4@127.711,167.589 rele4.4@127.711,167.615
  Bottom Layer w1: rele3.4 115.017,165.399 117.196,163.22 125.806,163.22 127.521,164.935 ; 127.622,165.036 127.711,165.125 128.301,165.716 rele4.4
NetBC4_1: BC4.1 R13.1 | length 1.8
  Top Layer w0.5: R13.1 146.926,159.783 BC4.1
NetBC4_3: BC4.3 D4.1 rele5.5 | length 15
  Top Layer w0.35: D4.1 D4.1@142.238,161.595 ; BC4.3@149.267,161.595 BC4.3
  Top Layer w0.5: D4.1@142.238,161.595 BC4.3@149.267,161.595 ; BC4.3 150.326,161.883 151.657,163.214 rele5.5
NetBC5_1: BC5.1 R14.1 | length 3.4
  Top Layer w0.5: R14.1 150.062,138.659 BC5.1
NetBC5_3: BC5.3 D5.1 rele6.4 | length 11.8
  Top Layer w0.5: rele6.4 147.961,141.249 D5.1 148.495,141.283 BC5.3
NetBC7_1: BC7.1 R16.1 R20.2 | length 8.3
  Top Layer w0.5: BC7.1 93.401,149.711 R16.1 93.401,146.426 93.802,146.025 96.266,146.025 96.906,146.664 R20.2
NetBC7_3: BC7.3 Q1.1 R25.2 | length 9.3
  Top Layer w0.5: BC7.3 94.259,153.568 95.631,154.94 Q1.1 96.749,158.136 R25.2
NetBC8_1: BC8.1 R19.2 | length 8.9
  Top Layer w0.5: BC8.1 134.203,137.373 134.925,136.652 137.16,136.652 139.527,139.019 R19.2
NetBC8_3: BC8.3 D7.1 rele8.4 | length 12.9
  Top Layer w0.5: rele8.4 128.784,146.4 133.57,141.614 BC8.3 138.703,141.614 D7.1
NetBC9_1: BC9.1 re1.1 | length 1.6
  Top Layer w0.5: re1.1 122.678,139.641 BC9.1
NetBC9_3: BC9.3 CO.2 | length 14.4
  Top Layer w0.35: CO.2@124.384,155.092 CO.2@124.384,155.566 ; BC9.3@125.171,141.656 BC9.3
  Top Layer w0.5: CO.2 124.384,154.788 124.384,144.196 125.171,143.408 BC9.3
NetBC10_1: BC10.1 R18.2 R26.1 | length 4.4
  Top Layer w0.5: R26.1 151.343,117.124 151.298,117.169 BC10.1
NetBC10_3: BC10.3 R31.1 | length 5.4
  Top Layer w0.5: R31.1 151.991,121.137 BC10.3
NetBC11_1: BC11.1 R27.2 | length 2.7
  Top Layer w0.35: 100.218,149.977 100.254,150.012
  Top Layer w0.5: BC11.1@99.119,149.977 100.218,149.977 ; 100.254,150.012 100.609,149.657 R27.2
NetBC11_3: BC11.3 R20.1 | length 4.1
  Top Layer w0.5: BC11.3@97.019,150.927 97.019,150.021 98.776,148.265 R20.1
NetBC12_1: BC12.1 R30.1 | length 2
  Top Layer w0.5: R30.1@142.773,119.197 142.915,119.339 BC12.1
NetBC12_3: BC12.3 R26.2 | length 2.5
  Top Layer w0.5: BC12.3 147.218,118.389 147.93,119.101 148.865,119.101 R26.2
NetBC13_1: BC13.1 R36.2 | length 2.8
  Top Layer w0.35: R36.2 136.936,104.932 138.694,106.69 BC13.1
NetBC13_3: BC13.3 Buzzer1.2 | length 13.2
  Top Layer w0.35: BC13.3 v1(142.265,105.74)
  Bottom Layer w0.35: v1(142.265,105.74) 143.688,107.163 149.586,107.163 Buzzer1.2
Netcr_1: cr.1 rr.2 U3.7 | length 8.7
  Top Layer w0.35: cr.1@113.182,124.718 113.954,125.489 U3.7
  Top Layer w0.5: rr.2 113.199,124.404 cr.1@113.347,124.553
NetD1_C: D1.C DZ3.2 R9.1 | length 26.5
  Top Layer w0.35: 113.081,146.863 113.081,147.102 R9.1
  Top Layer w0.4: 113.081,146.863 111.252,145.034 111.252,141.3 108.102,138.151 108.102,136.347 109.474,134.976 113.157,134.976 115.436,137.255 D1.C@117.342,137.255
  Top Layer w0.5: R9.1 113.503,147.524 DZ3.2
NetDin1_1: Din1.1 Inbutton1.1 | length 4.3
  Bottom Layer w0.5: Din1.1 139.548,94.056 Inbutton1.1
NetIn+1_1: In+1.1 Inbutton1.2 | length 4.5
  Top Layer w1: Inbutton1.2 149.174,94.005 In+1.1
NetL1_1: L1.1 rele8.1 U2.6 U2.7 | length 26.8
  Top Layer w1: L1.1 141.768,135.357 146.152,135.357 146.939,134.569 U2.7 U2.6
  Bottom Layer w0.5: rele8.1 135.927,144.616 140.117,140.426 L1.1
NetL1_2: L1.2 R28.1 rele8.2 | length 29.5
  Top Layer w0.35: rele8.2@129.076,156.774 rele8.2@129.368,157.066 ; R28.1@130.323,142.088 131.496,142.088 133.452,140.132 133.452,135.371 L1.2
  Top Layer w0.5: rele8.2 127.076,155.358 127.076,144.983 128.384,143.675 129.553,143.675 130.323,142.905 130.323,142.088 R28.1
NetP1_7: P1.7 R21.2 | length 14.8
  Top Layer w0.35: P1.7@101.219,127.127 101.397,127.127 P1.7@101.473,127.051
  Top Layer w0.5: R21.2 95.377,130.505 98.755,127.127 101.143,127.127 P1.7
NetpinIN1_2: pinIN1.2 rele2.1 | length 26.8
  Bottom Layer w1: pinIN1.2 87.884,163.525 94.361,170.002 104.394,170.002 106.607,167.789 rele2.1
NetR5_2: R5.2 U1.7 | length 4.3
  Top Layer w0.35: U1.7 114.427,144.145 R5.2@116.483,144.145
  Top Layer w0.5: U1.7 116.413,144.196 R5.2
NetR6_1: R6.1 R8.1 U1.5 | length 4.7
  Top Layer w0.35: R8.1@113.375,137.16 R8.1 113.349,139.116 R6.1 ; R6.1@113.603,139.116 U1.5@113.603,141.707 ; U1.5@114.351,141.681 U1.5
NetR22_2: R22.2 R31.2 U2.2 | length 4
  Top Layer w0.5: U2.2 146.939,123.033 R31.2 147.163,122.809 R22.2
NetR33_1: R33.1 R34.2 U3.10 | length 62.2
  Top Layer w0.35: v1(112.039,103.886) 117.17,103.886 120.498,107.213 130.962,107.213 131.491,106.685 R33.1 ; v1(115.443,122.301) 116.103,122.301 117.792,123.989 U3.10 ; R33.1@131.745,106.07 133.126,106.07 R34.2@133.152,106.096
  Bottom Layer w0.35: 103.086,111.2 103.086,111.29
  Bottom Layer w0.5: v1(112.039,103.886) 111.912,104.013 105.334,104.013 103.086,106.261 103.086,111.2 104.597,112.711 104.597,115.138 105.994,116.535 111.049,116.535 115.164,120.65 115.164,122.022 v1(115.443,122.301)
Netrele1_2: rele1.2 rele3.1 | length 40.9
  Top Layer w0.35: rele1.2@88.341,178.072 rele1.2@88.722,177.691 ; rele3.1@119.964,165.139 119.964,164.846 rele3.1@120.244,164.567
  Top Layer w1: rele1.2 88.722,177.691 94.176,172.237 117.78,172.237 119.967,170.05 rele3.1
Netrele1_3: rele1.3 rele2.3 | length 17.2
  Top Layer w0.35: rele1.3@98.241,178.072 rele1.3@98.432,177.881 ; rele2.3@111.557,177.519 rele2.3@112.084,178.046
  Top Layer w1: rele1.3 101.637,174.295 108.333,174.295 111.557,177.519 rele2.3
Netrele2_2: rele2.2 rele4.1 | length 40.2
  Bottom Layer w1: rele2.2 102.038,178.046 104.986,178.046 110.465,172.568 131.166,172.568 133.251,170.482 rele4.1
Netrele3_2: rele3.2 rele5.1 | length 45.5
  Top Layer w1: rele3.2 117.108,179.68 144.094,179.68 146.707,177.066 rele5.1
Netrele5_3: rele5.3 rele6.1 | length 34.9
  Bottom Layer w1: rele6.1 147.12,161.217 149.149,163.246 149.149,175.114 rele5.3
NetU3_3: U3.3
NetU3_4: U3.4
NetU3_11: U3.11
NetU3_38: U3.38
outSelonoeid: Q1.2 rele4.3 | length 55.7
  Top Layer w0.75: 126.594,163.474 126.594,170.866
  Top Layer w1: Q1.2 99.289,155.423 100.99,157.124 114.478,157.124 116.484,155.118 120.117,155.118 121.183,156.185 121.183,158.064 126.594,163.474 ; 126.594,170.866 133.317,177.589 rele4.3
outSimulation+5: CO.1 R23.1 R28.2 R29.2 rele6.2 | length 42.2
  Top Layer w0.35: R28.2 128.503,141.757 R29.2 128.503,137.993 R23.1@128.6,137.897 ; rele6.2@142.462,157.333 rele6.2@142.754,157.041
  Top Layer w0.5: R28.2 125.783,144.478 125.783,156.512 125.019,157.277 124.834,157.092 CO.1 124.079,157.328 125.806,159.055 140.156,159.055 rele6.2
pa0: DZ1.2 R1.2 R4.1 U1.3 U3.14 | length 67.7
  Top Layer w0.35: 106.337,143.091 104.165,140.919 104.165,117.094 105.334,115.926 110.846,115.926 116.909,121.989 U3.14 ; 106.782,147.396 106.913,147.528 R1.2@109.215,147.528
  Top Layer w0.5: DZ1.2 107.137,151.409 106.21,150.482 106.21,146.825 ; U1.3 106.502,142.926 106.337,143.091 105.512,143.916 105.512,146.126 106.21,146.825 ; R4.1 109.322,147.503 109.215,147.396 106.782,147.396 106.21,146.825
pa1: DZ2.2 R5.1 U3.15 | length 73.3
  Top Layer w0.35: v2@103.53,144.12 103.53,116.662 104.877,115.316 111.354,115.316 117.527,121.489 U3.15 ; DZ2.2@120.498,143.994 121.97,143.994 v2(122.047,143.916)
  Top Layer w0.5: R5.1 120.219,144.272 DZ2.2@120.498,143.994
  Bottom Layer w0.5: v2(103.505,142.418) 103.454,142.469 v2(103.454,144.12) 103.454,144.628 103.403,144.678 105.562,146.837 119.05,146.837 121.971,143.916 v2(122.047,143.916)
pa2: P3.8 U3.16 | length 20.2
  Top Layer w0.35: P3.8 108.204,108.306 108.204,110.414 118.78,120.989 U3.16@120.244,120.989
pa3: P3.7 U3.17 | length 16.5
  Top Layer w0.35: P3.7 115.189,115.443 118.847,115.443 121.32,117.916 U3.17
pa4: D1.A R10.1 U1.6 U3.20 | length 50.2
  Top Layer w0.35: v1(115.265,139.598) 115.265,139.548 v1@115.405,139.548 ; D1.A@117.342,141.485 D1.A@117.406,141.549 ; v2(121.412,116.332) 122.82,117.74 U3.20
  Top Layer w0.5: U1.6 115.901,142.926 117.342,141.485 v1@115.405,139.548 ; D1.A@117.406,141.549 R10.1
  Bottom Layer w0.35: v1(115.265,139.598) 117.424,139.598 119.431,137.592 119.431,132.563 122.961,129.032 126.619,129.032 128.854,126.797 128.854,119.964 125.222,116.332 v2(121.412,116.332)
pa5: P3.5 U3.21 | length 17.6
  Top Layer w0.35: P3.5 111.938,110.795 115.468,114.325 121.31,114.325 123.32,116.335 U3.21
pa6: P3.4 U3.22 | length 19.8
  Top Layer w0.35: P3.4 113.462,108.128 113.462,108.153 113.233,108.382 113.233,110.388 116.434,113.589 121.463,113.589 123.82,115.946 U3.22
pa7: P3.3 U3.23 | length 16
  Top Layer w0.35: P3.3 114.478,110.058 117.196,112.776 121.514,112.776 124.32,115.582 U3.23
pa8: R30.2 U3.41 | length 26.6
  Top Layer w0.35: U3.41 134.98,124.989 136.55,123.419 136.55,116.586 137.82,115.316 137.82,113.055 138.811,112.065 v1(139.675,112.065)
  Top Layer w0.5: v1(142.773,115.595) 142.773,117.226 R30.2
  Bottom Layer w0.5: v1(139.675,112.065) 140.437,112.065 142.773,114.402 v1(142.773,115.595)
pa9: U3.42 uart.1 | length 16.4
  Top Layer w0.35: U3.42 135.191,125.489 137.211,123.469 137.211,117.196 137.947,116.459 uart.1
pa10: U3.43
pa11: U3.44
pa12: U3.45
pa13: P5.1 U3.46 | length 14.6
  Top Layer w0.35: U3.46 133.953,127.489 137.897,123.546 137.897,119.659 138.1,119.456 P5.1
pa14: P5.2 U3.49 | length 15.3
  Top Layer w0.35: U3.49 128.82,130.793 129.056,130.556 131.851,130.556 139.751,122.657 P5.2
pa15: BC1.3 R2.1 U3.50 | length 55.2
  Top Layer w0.35: U3.50 128.32,131.469 129.311,132.461 v1(129.972,132.461)
  Top Layer w0.5: BC1.3 91.064,143.241 R2.1 90.576,142.692 90.576,141.249 90.957,140.868 98.527,140.868 99.72,139.675 v1(99.72,137.211)
  Bottom Layer w0.35: v1(99.72,137.211) 101.016,138.506 109.957,138.506 112.09,140.64 117.704,140.64 124.917,133.426 124.917,132.385 125.654,131.648 129.159,131.648 v1(129.972,132.461)
pb0: R36.1 U3.26 | length 29.8
  Top Layer w0.35: U3.26 125.82,115.279 120.523,109.982 120.523,108.255 121.006,107.772 135.733,107.772 R36.1
pb1: re1.2 U3.27 | length 59.3
  Top Layer w0.35: v1(126.238,113.767) 126.32,113.848 U3.27
  Top Layer w0.5: re1.2 122.703,137.795 v1(126.34,137.795)
  Bottom Layer w0.35: v1(126.238,113.767) 124.155,113.767 120.599,110.211 120.599,108.458 121.539,107.518 125.603,107.518 125.959,107.874 125.959,109.499 131.293,114.833 131.293,135.001
  Bottom Layer w0.5: v1(126.34,137.795) 128.499,137.795 131.293,135.001
pb6: R27.1 U3.58 | length 50.3
  Top Layer w0.35: U3.58 124.32,132.625 125.603,133.909 v1(125.603,135.179)
  Top Layer w0.5: R27.1 103.713,146.715 104.496,147.498 104.496,150.317 108.966,154.788 114.402,154.788 115.545,153.645 v1(115.545,153.619)
  Bottom Layer w0.35: v1(115.545,153.619) 118.847,153.619 123.876,148.59 123.876,136.906 v1(125.603,135.179)
pb8: P4.1 U3.61 | length 39.3
  Top Layer w0.35: v2(122.199,133.807) 122.199,133.301 122.427,133.528 122.77,133.186 122.77,130.489 122.834,130.424 U3.61
  Bottom Layer w0.35: P4.1@122.098,108.991 124.028,110.922 125.857,110.922 130.15,115.214 130.15,127.457 127.838,129.769 123.342,129.769 122.199,130.912 v2(122.199,133.807)
pb9: P4.2 U3.62 | length 40.9
  Top Layer w0.35: v2@121.056,133.452 122.32,132.188 U3.62
  Bottom Layer w0.35: 121.056,135.23 122.225,135.23 124.13,133.325 124.13,132.004 125.451,130.683 128.854,130.683 130.759,128.778 130.759,115.113 P4.2@124.638,108.991
  Bottom Layer w0.5: v2(120.447,133.604) 120.447,134.62 121.056,135.23
pb10: P4.3 U3.29 | length 10.1
  Top Layer w0.35: P4.3@127.178,108.991 127.32,109.133 U3.29
pb11: P4.4 U3.30 | length 10.9
  Top Layer w0.35: U3.30 127.82,111.753 129.718,109.855 P4.4@129.718,108.991
pb12: P4.5 U3.33 | length 13.2
  Top Layer w0.35: U3.33 131.69,120.989 132.258,120.421 P4.5@132.258,108.991
pb13: P4.6 U3.34 | length 15.1
  Top Layer w0.35: U3.34 132.257,121.489 133.096,120.65 133.096,110.693 P4.6@134.798,108.991
pb14: P4.7 U3.35 | length 16.8
  Top Layer w0.35: U3.35 132.62,121.989 133.706,120.904 133.706,112.624 P4.7@137.338,108.991
pb15: P4.8 U3.36 | length 18.6
  Top Layer w0.35: U3.36 132.958,122.489 134.163,121.285 134.163,114.706 P4.8@139.878,108.991
pc0: 9.7 U3.8 | length 70.8
  Top Layer w0.35: v1(105.842,140.386) 105.842,140.157 105.664,139.979 105.08,139.979 104.826,139.725 104.826,117.45 105.715,116.561 110.592,116.561 114.3,120.269 114.3,123.927 115.363,124.989 U3.8
  Top Layer w0.5: 9.7 90.043,146.126 90.983,145.186 100.584,145.186 101.702,144.069 v1@101.702,140.513
  Bottom Layer w0.5: v1@102.083,140.335 102.133,140.386 v1(105.842,140.386)
  other v1: 101.829,140.513
pc1: R29.1 R32.1 U3.9 | length 41.3
  Top Layer w0.35: 115.799,135.585 123.292,135.585 124.155,136.449 ; v1(115.875,123.901) 116.383,123.901 116.971,124.489 U3.9 ; R32.1 131.628,139.903 132.715,139.903 132.893,139.725 132.893,136.576 132.338,136.021
  Top Layer w0.4: 113.055,132.842 115.799,135.585
  Top Layer w0.5: 113.055,132.842 113.055,129.464 113.081,129.438 v1(113.284,129.438) ; 124.155,136.449 127.559,136.449 129.108,134.899 131.216,134.899 132.338,136.021
  Bottom Layer w1: v1(113.284,129.438) 113.284,126.492 v1(115.875,123.901)
pc4: P3.10 U3.24 | length 28.3
  Top Layer w0.35: P3.10 108.864,105.105 117.17,105.105 119.075,107.01 119.075,109.525 124.82,115.269 U3.24
pc5: U3.25
pc6: R19.1 U3.37 | length 50.4
  Top Layer w0.35: U3.37 133.246,122.989 134.696,121.539 134.696,115.138 138.938,110.896
  Top Layer w0.4: 138.938,110.896 141.224,110.896
  Top Layer w0.5: 141.224,110.896 141.58,111.252 141.58,128.905 138.227,132.258 138.227,134.95 141.397,138.12 R19.1
pc8: R13.2 U3.39 | length 67.1
  Top Layer w0.35: U3.39 132.957,123.989 135.712,121.234 135.712,115.849 v1(136.093,115.468)
  Top Layer w0.5: v1(142.519,159.868) 142.723,159.664 R13.2
  Bottom Layer w0.5: v1(136.093,115.468) 133.706,117.856 133.706,125.07 138.379,129.743 140.868,129.743 142.316,131.191 142.316,138.379 144.704,140.767 144.704,158.09 142.926,159.868 v1(142.519,159.868)
pc9: R14.2 U3.40 | length 26.4
  Top Layer w0.35: U3.40 133.778,124.489 134.899,123.368 v1(135.103,123.368) ; R14.2@145.39,138.532 R14.2
  Top Layer w0.5: v1(145.39,136.957) R14.2@145.39,138.532
  Bottom Layer w0.5: v1(135.103,123.368) 135.103,124.892 138.913,128.702 141.58,128.702 143.18,130.302 143.18,135.357 144.78,136.957 v1(145.39,136.957)
pc10: U3.51
pc11: U3.52
pc12: R12.2 U3.53 | length 44.6
  Top Layer w0.35: U3.53 126.82,131.849 127.533,132.563 v1(127.533,133.934)
  Top Layer w0.5: v1(117.551,157.632) 118.969,157.632 R12.2
  Bottom Layer w0.5: v1(117.551,157.632) 119.329,157.632 123.8,153.162 129.21,153.162 130.708,151.663 130.708,150.216 129.718,149.225 127.33,149.225 124.765,146.66 124.765,137.16 125.501,136.423 126.848,136.423 127.533,135.738 v1(127.533,133.934)
pc13: R11.2 U3.2 | length 76.3
  Top Layer w0.35: v1(116.84,127.889) 116.942,127.991 117.069,127.991 117.07,127.989 U3.2
  Top Layer w0.5: v1(101.956,162.611) 102.286,162.611 103.246,161.65 R11.2
  Bottom Layer w0.5: v1(101.956,162.611) 97.968,158.623 95.91,158.623 94.336,157.048 94.336,154.601 97.349,151.587 97.349,143.628 94.818,141.097 90.881,141.097 89.078,139.294 89.078,134.671 90.195,133.553 104.038,133.553 105.41,132.182 114.63,132.182 116.84,129.972 v1(116.84,127.889)
pd2: U3.54
scl: P1.3 R35.2 U3.57 | length 74.3
  Top Layer w0.35: v1@91.491,136.169 v1@91.491,136.5 ; P1.3@101.346,116.764 P1.3@101.473,116.891 ; U3.57 124.82,131.779 125.628,132.588 125.806,132.588 126.009,132.791 v1(126.187,132.791)
  Top Layer w1: v1(91.516,136.195) 91.491,136.169 91.491,119.278 94.158,116.611 100.94,116.611 P1.3
  Bottom Layer w0.35: v1(91.516,136.195) 91.516,136.677 91.999,136.195 95.758,136.195 98.755,139.192 109.398,139.192 111.506,141.3 117.881,141.3 126.187,132.994 v1(126.187,132.791)
  Bottom Layer w1: R35.2 99.665,116.891 P1.3
sda: P1.4 R37.2 U3.59 | length 48.8
  Top Layer w0.35: P1.4 102.235,119.431 102.87,120.066 102.87,136.627 102.743,136.754 102.057,136.754 102.286,136.982 v1(102.286,137.262) ; v1(116.84,134.417) 117.424,135.001 122.911,135.001 123.82,134.092 U3.59
  Bottom Layer w0.35: R37.2 R37.2@99.822,119.304 ; v1@102.438,137.262 106.731,137.262 109.017,134.976 116.84,134.976 v1(116.84,134.417)
  Bottom Layer w1: R37.2@99.822,119.304 99.949,119.431 P1.4
VCC: 4.1 5.2 7.1 9.8 10.1 12.1 13.1 14.1 ams1.2 ams1.4 ca2.2 cc1.2 P1.1 P3.1 R2.2 R6.2 R10.2 R24.2 R35.1 R37.1 rr.1 U1.8 U3.13 U3.19 U3.32 U3.48 U3.64 | length 260.7
  Top Layer w0.35: R24.2 R24.2@93.523,137.673 ; U1.8@113.894,145.466 U1.8 ; 12.1 114.126,127.889 112.446,127.889 111.557,128.778 111.557,132.258 115.443,136.144 118.694,136.144 120.04,137.49 R10.2 ; 12.1@116.154,130.099 121.009,130.099 U3.64 121.32,128.464 124.536,125.247 v2(124.917,125.247) ; 118.237,145.974 122.657,145.974 ; U3.13 122.159,122.489 v2@124.819,125.149 ; U3.19 122.32,120.211 123.012,120.904 123.901,120.904 124.819,121.822 v2@124.819,125.149 ; U3.48 128.159,128.489 v2(124.917,125.247) ; cc1.2 129.892,116.742 128.82,117.814 U3.32 128.82,121.345 v2(124.917,125.247) ; v2@124.819,125.149 v2(124.917,125.247)
  Top Layer w0.5: v1(87.376,142.494) 87.605,142.723 R2.2 ; ca2.2 91.618,152.425 92.304,153.111 92.354,153.06 v1(92.481,153.06) ; 4.1 93.419,99.718 99.401,105.7 10.1 ; ams1.4@99.307,99.718 ams1.4 ; v2@107.618,113.311 108.049,113.741 v2(108.077,113.741) ; rr.1 111.277,120.625 v1(111.582,120.32) ; R6.2 111.505,139.775 112.217,140.487 112.217,144.551 113.132,145.466 U1.8@113.894,145.466 ; U1.8 114.884,145.974 122.657,145.974 123.495,145.136 123.495,143.383 121.844,141.732 121.844,140.868 120.655,139.679 R10.2 ; 118.135,145.974 7.1
  Top Layer w0.7: 88.713,137.735 R24.2@93.461,137.735
  Top Layer w1: 88.676,137.947 R2.2 ; 88.713,137.735 86.436,135.458 86.436,114.071 89.306,111.201 v1(94.742,111.201) ; R24.2@93.461,137.735 R24.2 ; 10.1@100.281,105.865 100.281,105.974 103.77,109.463 ; ams1.2 ams1.4 ; P1.1@101.473,111.811 103.77,109.514 103.77,109.463 ; v2@107.618,113.311 103.77,109.463